# Altium PCB PCB1.PcbDoc (part 1 of 2)
Units mm, origin at the board's own origin, x right, y up, seen from the top; angles counter-clockwise.
Board outline 75.29 x 33.02 mm, 4 copper layers (Top Layer, Mid Layer 1, Mid Layer 2, Bottom Layer), stack 1.585 mm thick; 47 components, 61 nets, 235 pads, 195 vias.
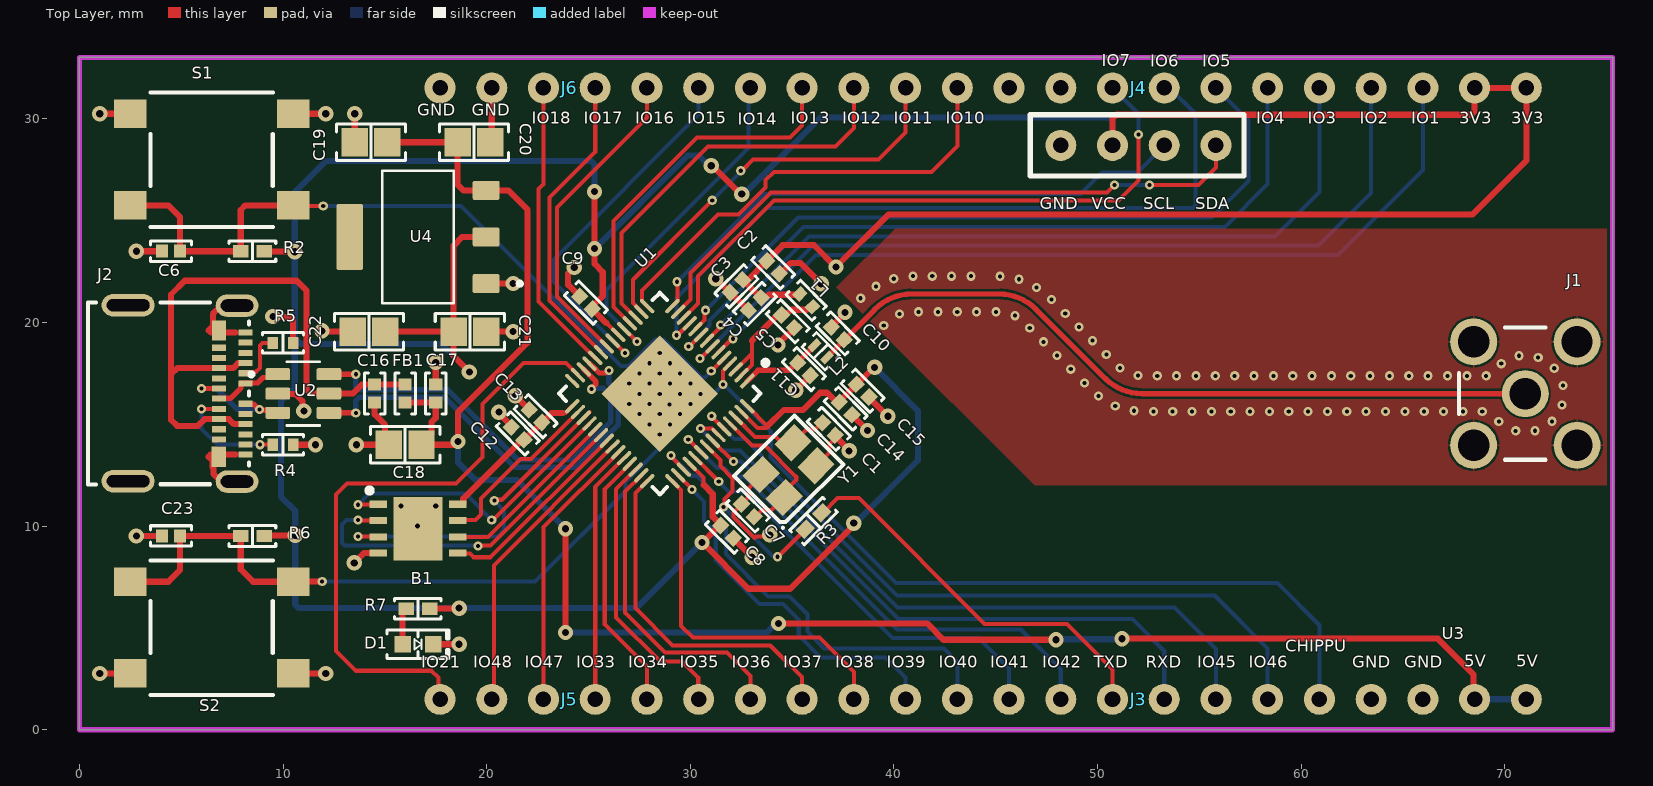
[diagram p0: Top Layer view]
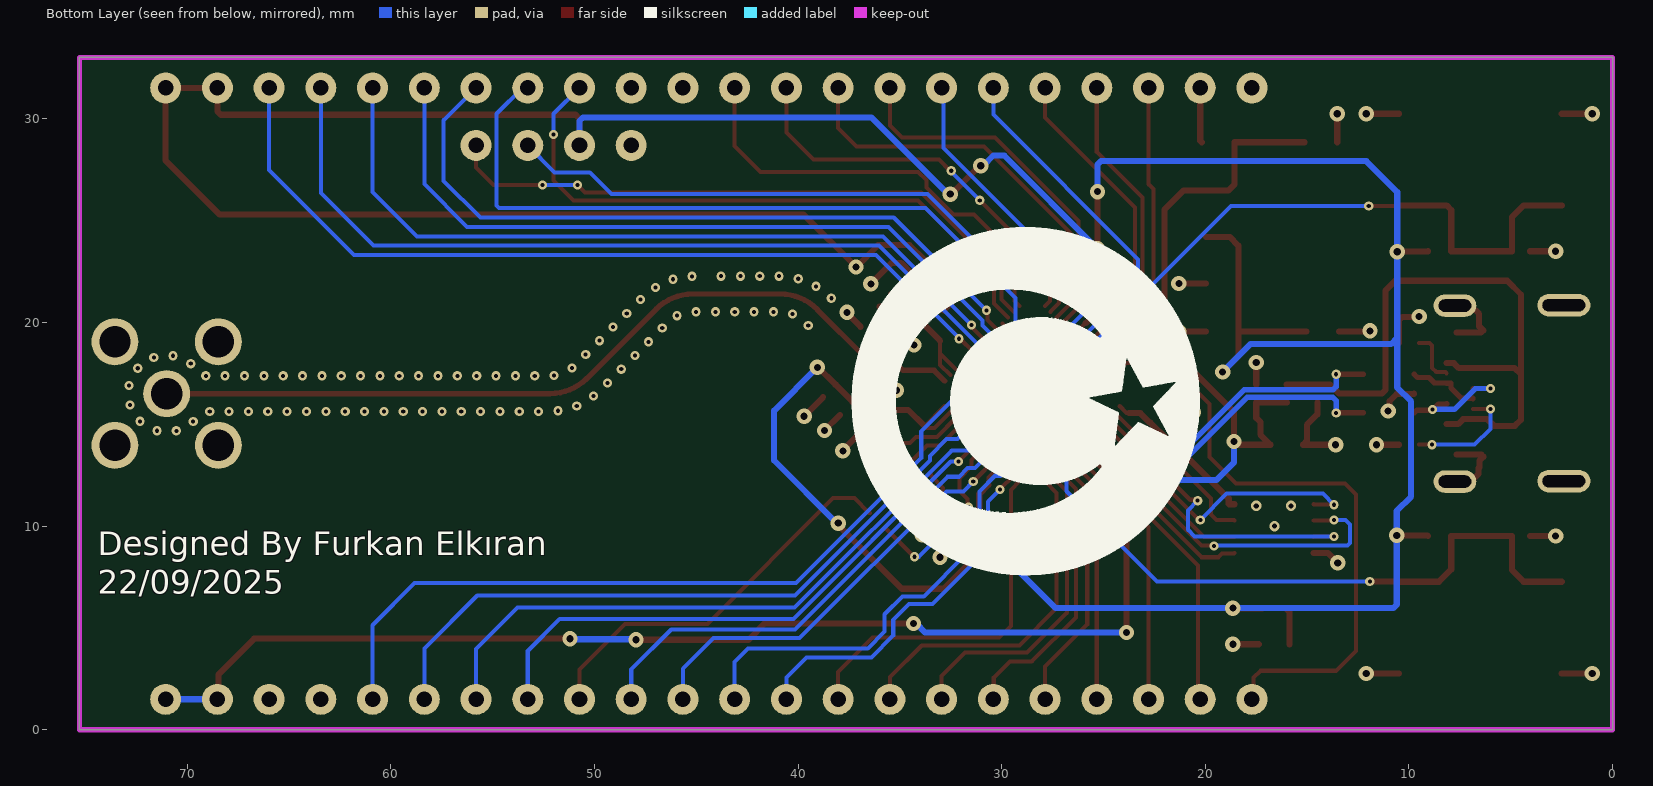
[diagram p1: Bottom Layer view, seen from below]
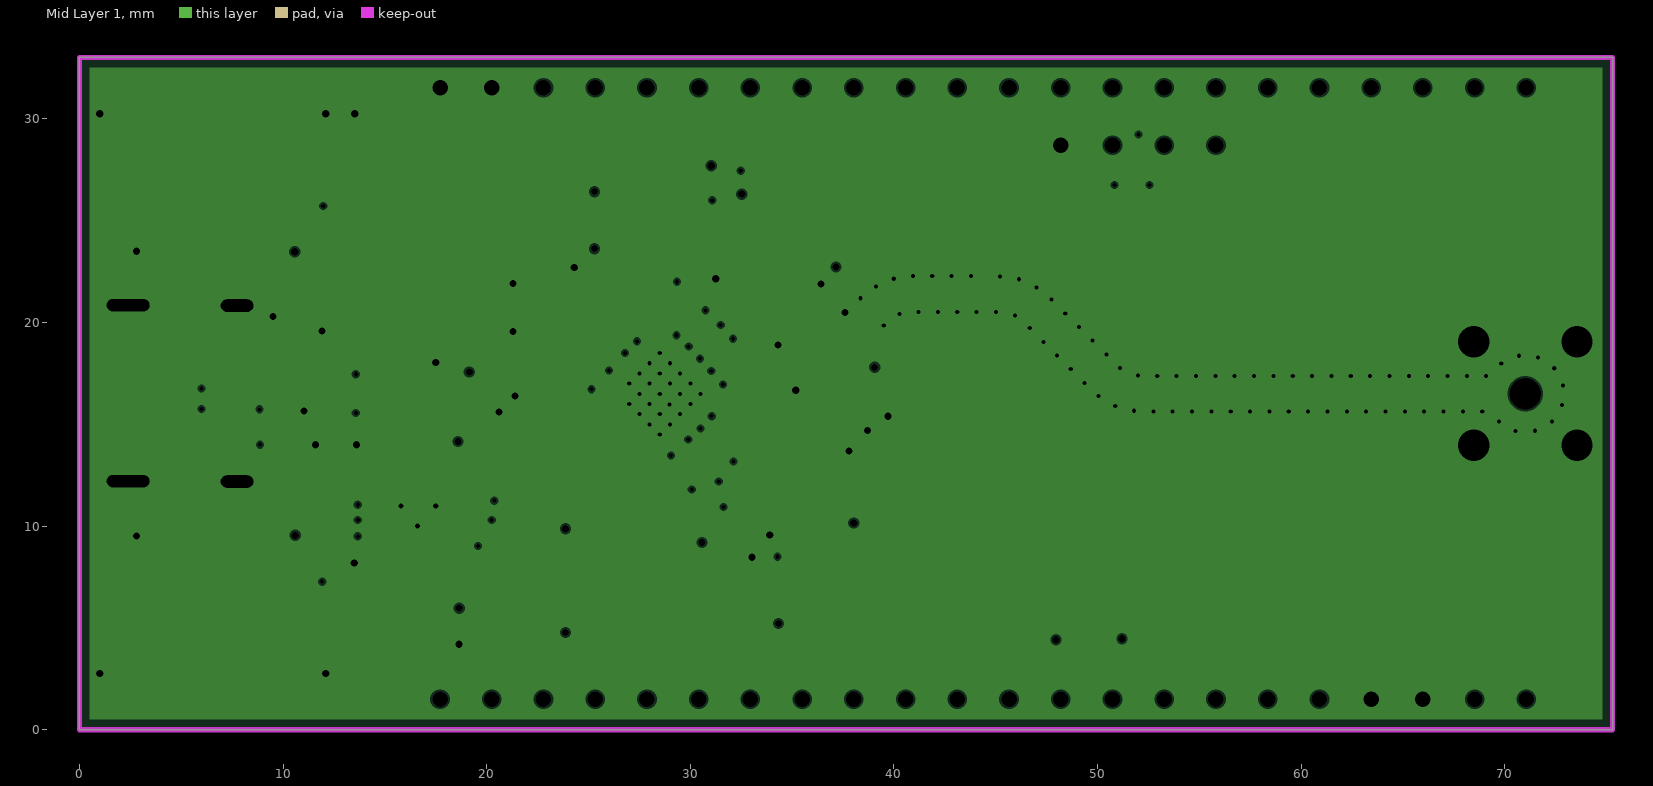
[diagram p2: Mid Layer 1, clearances drawn from the general rule]
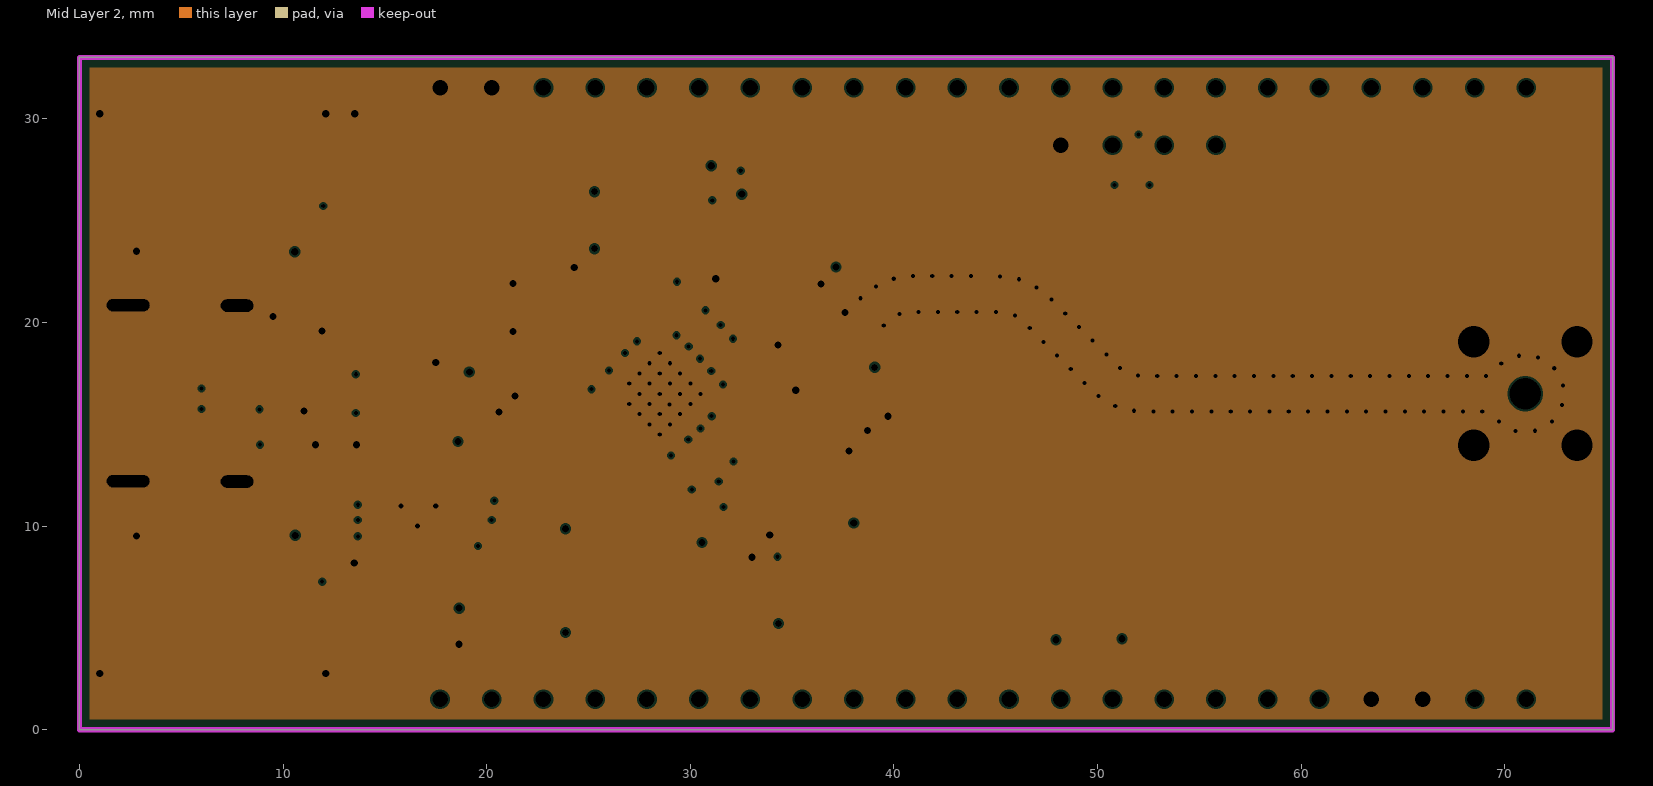
[diagram p3: Mid Layer 2, clearances drawn from the general rule]

## Layer stack, top to bottom
Top Solder: solder mask 0.0127, Solder Resist, Dk 3.8
Top Layer: signal copper 0.035
Dielectric 1: prepreg 0.21, 7628, Dk 4.4
Mid Layer 1: plane copper 0.0152, net GND
Core: core 1.065, FR-4, Dk 4.6
Mid Layer 2: plane copper 0.0152, net GND
Dielectric 2: prepreg 0.21, 7628, Dk 4.4
Bottom Layer: signal copper 0.035
Bottom Solder: solder mask 0.0127, Solder Resist, Dk 3.8

## Board outline
0,0 0,33.02 75.288,33.02 75.288,0

## Design rules (kind name [scope] priority, off if disabled: settings)
BoardOutlineClearance [All] p1: gap=0.2 ignorepadtopadclearanceinfootprint=FALSE
Clearance RF_Clearance [InNet('NetC10_2')] p1: gap=0.102 ignorepadtopadclearanceinfootprint=FALSE except(0.127: Arc-Via Track-Via SMDPad-Via THPad-Via Via-Via Via-Fill Via-Poly Via-Region Via-Text; 0.13: Arc-Poly Track-Poly; 0.25: Arc-Hole Track-Hole SMDPad-Hole THPad-Hole Via-Hole Fill-Hole Poly-Hole Region-Hole Text-Hole)
Clearance [All] p2: gap=0.102 ignorepadtopadclearanceinfootprint=FALSE except(0.127: Arc-Via Track-Via SMDPad-Via THPad-Via Via-Via Via-Fill Via-Poly Via-Region Via-Text; 0.25: Arc-Hole Track-Hole SMDPad-Hole THPad-Hole Via-Hole Fill-Hole Poly-Hole Region-Hole Text-Hole)
ComponentClearance [All] p1: gap=0.102 collisioncheckmode=3 verticalgap=0.102 showdistances=TRUE
DiffPairsRouting [All] p1: maxlimit=0.102 minlimit=0.102 mostfreqgap=0.102 toplayer_minwidth=0.102 toplayer_maxwidth=1816.048 toplayer_prefwidth=0.102 bottomlayer_minwidth=0.102 bottomlayer_maxwidth=1816.048 bottomlayer_prefwidth=0.102 maxuncoupledlength=12.7
DiffPairsRouting USB90R1 [InDifferentialPair('USBO')] p2: maxlimit=0.15 minlimit=0.15 mostfreqgap=0.15 toplayer_minwidth=0.265 toplayer_maxwidth=0.265 toplayer_prefwidth=0.265 bottomlayer_minwidth=0.265 bottomlayer_maxwidth=0.265 bottomlayer_prefwidth=0.265 impedanceprofiledriven=TRUE impedanceprofileid={DA624E46-C224-4D8B-AF26-3BDF44110CB9} impedanceprofilevalue=90.000000 maxuncoupledlength=12.7
DiffPairsRouting USB90R [InDifferentialPair('USBC')] p3: maxlimit=0.15 minlimit=0.15 mostfreqgap=0.15 toplayer_minwidth=0.265 toplayer_maxwidth=0.265 toplayer_prefwidth=0.265 bottomlayer_minwidth=0.265 bottomlayer_maxwidth=0.265 bottomlayer_prefwidth=0.265 impedanceprofiledriven=TRUE impedanceprofileid={DA624E46-C224-4D8B-AF26-3BDF44110CB9} impedanceprofilevalue=90.000000 maxuncoupledlength=12.7
Height [All] p1: minheight=0 maxheight=1816.048 prefheight=12.7
HoleSize [All] p1: absolutevalues=TRUE maxlimit=6.3 minlimit=0.2 maxpercent=80.000 minpercent=20.000
HoleToHoleClearance [All] p1: gap=0.25 allowstackedmicrovias=FALSE
MinimumAnnularRing [All] p1: minimumring=0.076
MinimumSolderMaskSliver [All] p1: minsoldermaskwidth=0
PlaneClearance [All] p1: clearance=0.102
PlaneConnect PlaneConnectPowerPads [InPadClass('PowerPads')] p1: planeconnectstyle=Direct reliefexpansion=0.508 reliefentries=4 reliefconductorwidth=0.254 reliefairgap=0.254
PlaneConnect [All] p2: pad.planeconnectstyle=Relief pad.reliefexpansion=0.3 pad.reliefentries=4 pad.reliefconductorwidth=0.102 pad.reliefairgap=0.102 via.planeconnectstyle=Direct via.reliefexpansion=0.3 via.reliefentries=4 via.reliefconductorwidth=0.127 via.reliefairgap=0.127
PolygonConnect PolygonConnectPowerPads [All vs (InPadClass('PowerPads'))] p1: connectstyle=Direct reliefconductorwidth=0.254 reliefentries=4 polygonreliefangle="90 Angle" airgapwidth=0.254
PolygonConnect [All] p2: thpad.connectstyle=Relief thpad.reliefconductorwidth=0.102 thpad.reliefentries=4 thpad.polygonreliefangle="90 Angle" thpad.airgapwidth=0.102 smdpad.connectstyle=Relief smdpad.reliefconductorwidth=0.102 smdpad.reliefentries=4 smdpad.polygonreliefangle="90 Angle" smdpad.airgapwidth=0.102 via.connectstyle=Direct via.reliefconductorwidth=0.127 via.reliefentries=4 via.polygonreliefangle="90 Angle" via.airgapwidth=0.127
RoutingVias [All] p1: holewidth=0.2 width=0.45 viastyle="Through Hole" minholewidth=0.15 minwidth=0.3 maxholewidth=6.3 maxwidth=6.55
SilkToSilkClearance [All] p1: silktosilkclearance=0
SilkToSolderMaskClearance [IsPad] p1: minsilkscreentomaskgap=0.102 clearancetoexposedcopper=TRUE
SolderMaskExpansion [All] p1: expansion=0.075 istentingtop=FALSE
SupplyNets "Schematic Supply Nets_3" [InNet('VBUS')] p1: voltage=0.000
SupplyNets "Schematic Supply Nets_2" [InNet('GND')] p2: voltage=0.000
SupplyNets "Schematic Supply Nets_1" [InNet('+5')] p3: voltage=0.000
SupplyNets "Schematic Supply Nets" [InNet('3V3')] p4: voltage=0.000
Width [All] p1: maxlimit=1816.048 minlimit=0.102 preferedwidth=0.102
Width RF_50R1 [InNet('NetC10_2')] p2: maxlimit=0.263 minlimit=0.263 preferedwidth=0.263 impedanceprofiledriven=TRUE impedanceprofileid={817B1D0C-1745-41DE-895A-E69CDF0ADFAD} impedanceprofilevalue=50.000000 minimp=50.000000 maximp=50.000000 favimp=50.000000
Width RF_50 [InNet('LNA_IN')] p3: maxlimit=0.263 minlimit=0.263 preferedwidth=0.263 impedanceprofiledriven=TRUE impedanceprofileid={817B1D0C-1745-41DE-895A-E69CDF0ADFAD} impedanceprofilevalue=50.000000 minimp=50.000000 maximp=50.000000 favimp=50.000000
20 further rules are at their usual default settings.

## Classes and differential pairs
component class U_USB-C: C16 C17 C18 FB1 J2 R4 R5 U2
component class U_SSD1306: U3
component class U_Power: C19 C20 C21 C22 D1 R7 U4
component class U_ESP32-S3: B1 C1 C2 C3 C4 C5 C6 C7 C8 C9 C10 C11 C12 C13 C14 C15 C23 J1 L1 L2 R2 R3 R6 S1 S2 U1 Y1
component class "Main Sheet": J3 J4 J5 J6
differential pair USBO: +USBO_P -USBO_N
differential pair USBC: +USBC_P -USBC_N

## Components (designator, comment, footprint, x,y, rotation, side; value= is the part's Value field where it differs from the comment)
B1 "W25Q64JVXGIQ_TR" SON80P400X400X50-9N 16.625,9.875 r0 top
C1 "10pF" "CAP 0402_1005" 36.8,14.775 r315 top
C2 "10µF" "CAP 0402_1005" 34.064,22.711 r135 top
C3 "1 µF" "CAP 0402_1005" 32.264,21.786 r45 top
C4 "0.1µF" "CAP 0402_1005" 33.164,20.911 r45 top
C5 "0.1µF" "CAP 0402_1005" 34.789,20.061 r135 top
C6 "1 µF" "CAP 0402_1005" 4.5,23.5 r0 top
C7 "10pF" "CAP 0402_1005" 32.825,10.775 r315 top
C8 "0.1µF" "CAP 0402_1005" 31.8,9.725 r135 top
C9 "0.1µF" "CAP 0402_1005" 24.875,20.975 r315 top
C10 "1pF" "CAP 0402_1005" 37.239,19.461 r315 top
C11 "1pF" "CAP 0402_1005" 35.579,17.711 r135 top
C12 "0.1µF" "CAP 0402_1005" 21.525,14.55 r315 top
C13 "0.1µF" "CAP 0402_1005" 22.4,15.4 r315 top
C14 "1 µF" "CAP 0402_1005" 37.625,15.775 r135 top
C15 "1 µF" "CAP 0402_1005" 38.46,16.65 r135 top
C16 "10000pF" "CAP 0402_1005" 14.5,16.51 r90 top
C17 "0.1µF" "CAP 0402_1005" 17.5,16.51 r270 top
C18 "4.7 µF" "CAP 0805_2012" 16,14 r0 top
C19 "10 µF" "CAP 0805_2012" 14.325,28.85 r0 top
C20 "0.1µF" "CAP 0805_2012" 19.375,28.85 r180 top
C21 "0.1µF" "CAP 0805_2012" 19.175,19.55 r180 top
C22 "10 µF" "CAP 0805_2012" 14.225,19.55 r0 top
C23 "1 µF" "CAP 0402_1005" 4.5,9.52 r0 top
D1 "Red" "LED 0603_1608 RED" 16.625,4.2 r0 top
FB1 "33 Ohms @ 100 MHz" "FER 0402_1005" 16,16.51 r270 top
J1 "0731000114" "MOLEX SD-73100-0114" 71,16.51 r0 top
J2 "1054500101" "Molex 1054500101" 7.5,16.51 r270 top
J3 "1x16 Male Pin" "1X16 MALE PIN" 52,1.5 r270 top
J4 "1x16 Male Pin" "1X16 MALE PIN" 52,31.52 r270 top
J5 "1x6 Male Pin" "1X6 MALE PIN" 24.06,1.5 r270 top
J6 "1x6 Male Pin" "1X6 MALE PIN" 24.06,31.52 r270 top
L1 "2 nH" "IND 0402_1005" 35.689,21.086 r315 top
L2 "3.3 nH" "Murata LQG15 0402" 36.404,18.586 r135 top
R2 "10 kOhms" "RES 0402_1005" 8.5,23.5 r0 top
R3 "499 Ohms" "RES 0402_1005" 36.05,10.25 r225 top
R4 "5.1 kOhms" "YAGEO RES 0402_1005" 10,14 r180 top
R5 "5.1 kOhms" "YAGEO RES 0402_1005" 10,19 r180 top
R6 "10 kOhms" "RES 0402_1005" 8.5,9.52 r0 top
R7 "1 kOhms" "RES 0402_1005" 16.625,5.95 r0 top
S1 "B3FS-1012P" "OMRON B3FS-1012P" 6.5,28 r180 top
S2 "B3FS-1012P" "OMRON B3FS-1012P" 6.5,5.02 r0 top
U1 "ESP32-S3R8" FP-ESP32-S3R8-IPC_A 28.5,16.51 r225 top locked
U2 "USBLC6-2SC6" SOT95P280X145-6N 11,16.51 r0 top
U3 "SSD1306" SSD1306 52,16.51 r0 top locked
U4 "AMS1117-3.3" SOT229P700X180-4N 16.625,24.2 r180 top
Y1 "40 MHz" "NDK NX3225SA" 34.825,12.75 r45 top

## Footprints (in the part's own frame and the unit in brackets; to place one, negate y for a bottom-side part, rotate by r counter-clockwise, add the part's x,y. Pads: shape width x height; smd on the part's side, far side on the other; paste and mask are expansions set on the pad)
"1X6 MALE PIN" [mil]
  round 60 hole 30: 1(0,250) 2(0,150) 3(0,50) 4(0,-50) 5(0,-150) 6(0,-250)
  body extent -51,-301 49,299, height 110
"1X16 MALE PIN" [mil]
  round 60 hole 30: 1(0,750) 2(0,650) 3(0,550) 4(0,450) 5(0,350) 6(0,250) 7(0,150) 8(0,50) 9(0,-50) 10(0,-150) 11(0,-250) 12(0,-350) 13(0,-450) 14(0,-550) 15(0,-650) 16(0,-750)
  body extent -50,-801 50,799, height 110
"CAP 0402_1005" [mm] "Chip Capacitor, 2-Leads, Body 1.02x0.51mm, IPC Medium Density"
  rect 0.6x0.64 smd: 1(-0.44,0) 2(0.44,0)
  silkscreen extent -1,-0.5 1,0.5, body extent -0.5,-0.26 0.5,0.26, height 0.52
"CAP 0805_2012" [mm] "Chip Capacitor, 2-Leads, Body 2.00x1.20mm, IPC Medium Density"
  rect 1.3x1.4 smd: 1(-0.8,0) 2(0.8,0)
  silkscreen extent -1.7,-0.9 1.7,0.9, body extent -1,-0.64 1,0.64, height 1.26
"FER 0402_1005" [mm] "Chip Ferrite, 2-Leads, Body 1.02x0.51mm, IPC Medium Density"
  rect 0.6x0.64 smd: 1(-0.44,0) 2(0.44,0)
  silkscreen extent -1,-0.5 1,0.5, body extent -0.5,-0.26 0.5,0.26, height 0.52
FP-ESP32-S3R8-IPC_A [mm]
  rect 0.918x0.192 smd paste+0 mask+0: 1(-3.477,2.6)
  rrect100% 0.918x0.192 smd paste+0 mask+0: 2(-3.477,2.2) 3(-3.477,1.8) 4(-3.477,1.4) 5(-3.477,1) 6(-3.477,0.6) 7(-3.477,0.2) 8(-3.477,-0.2) 9(-3.477,-0.6) 10(-3.477,-1) 11(-3.477,-1.4) 12(-3.477,-1.8) 13(-3.477,-2.2) 14(-3.477,-2.6) 29(3.477,-2.6) 30(3.477,-2.2) 31(3.477,-1.8) 32(3.477,-1.4) 33(3.477,-1) 34(3.477,-0.6) 35(3.477,-0.2) 36(3.477,0.2) 37(3.477,0.6) 38(3.477,1) 39(3.477,1.4) 40(3.477,1.8) 41(3.477,2.2) 42(3.477,2.6)
  rrect100% 0.192x0.918 smd paste+0 mask+0: 15(-2.6,-3.477) 16(-2.2,-3.477) 17(-1.8,-3.477) 18(-1.4,-3.477) 19(-1,-3.477) 20(-0.6,-3.477) 21(-0.2,-3.477) 22(0.2,-3.477) 23(0.6,-3.477) 24(1,-3.477) 25(1.4,-3.477) 26(1.8,-3.477) 27(2.2,-3.477) 28(2.6,-3.477) 43(2.6,3.477) 44(2.2,3.477) 45(1.8,3.477) 46(1.4,3.477) 47(1,3.477) 48(0.6,3.477) 49(0.2,3.477) 50(-0.2,3.477) 51(-0.6,3.477) 52(-1,3.477) 53(-1.4,3.477) 54(-1.8,3.477) 55(-2.2,3.477) 56(-2.6,3.477)
  rect 4.05x4.05 smd paste-1000 mask+0: 57(0,0)
  silkscreen extent -4.86,-3.5 3.5,3.5, body extent -3.5,-3.5 3.5,3.5, height 0.9
"IND 0402_1005" [mm] "Inductor, 2-Leads, Body 1.02x0.51mm, IPC Medium Density"
  rect 0.5x0.6 smd: 1(-0.44,0) 2(0.44,0)
  silkscreen extent -0.9,-0.5 0.9,0.5, body extent -0.5,-0.3 0.5,0.3, height 0.6
"LED 0603_1608 RED" [mm] "Chip Diode, 2-Leads, Body 1.60x0.80mm, IPC Medium Density"
  rect 0.8x0.8 smd: 1(-0.75,0) 2(0.75,0)
  silkscreen extent -1.52,-0.7 1.52,0.7, body extent -0.8,-0.4 0.8,0.4, height 0.53
"Molex 1054500101" [mm] "USB-C Receptacle Connector 24 Position Surface Mount, 24 Position, Body 8.94x7.90mm"
  rect 0.3x0.7 smd: A1(-3,0.655) A2(-2.5,0.655) A3(-2,0.655) A4(-1.5,0.655) A5(-1,0.655) A6(-0.5,0.655) A7(0.5,0.655) A8(1,0.655) A9(1.5,0.655) A10(2,0.655) A11(2.5,0.655) A12(3,0.655) B2(2.25,-0.645) B3(1.75,-0.645) B4(1.25,-0.645) B5(0.75,-0.645) B6(0.25,-0.645) B7(-0.25,-0.645) B8(-0.75,-0.645) B9(-1.25,-0.645) B10(-1.75,-0.645) B11(-2.25,-0.645)
  rect 1x0.7 smd: B1(3.1,-0.655) B12(-3.1,-0.645)
  oval 1.1x2.6 hole 2.1 slot 0.6 at 0 deg: S(-4.34,-5.105) S(4.3,-5.105)
  oval 1.1x2.1 hole 1.6 slot 0.6 at 0 deg: S(-4.32,0.245) S(4.32,0.245)
  silkscreen extent -4.47,-7.07 4.47,0.83, body extent -4.47,-7.07 4.47,0.83, height 3.21
"MOLEX SD-73100-0114" [mm]
  round 2.302 hole 1.54: G(-2.54,-2.54) G(2.54,-2.54)
  round 2.304 hole 1.54: G(-2.54,2.54) G(2.54,2.54) S(0,0)
  silkscreen extent -3.25,-3.25 1,3.25, body extent -3.12,-3.17 11.68,3.17, height 9.67
"Murata LQG15 0402" [mm] "Chip Inductor, 2-Leads, Body 1.00x0.50mm, IPC High Density"
  rect 0.35x0.65 smd: 1(-0.425,0) 2(0.425,0)
  silkscreen extent -0.8,-0.5 0.8,0.5, body extent -0.52,-0.27 0.53,0.28, height 0.55
"NDK NX3225SA" [mm] "Crystal, 4-Leads, Body 2.50x3.20mm, Pitch 2.20mm, IPC Medium Density"
  rect 1.4x1.2 smd: 1(-1.1,-0.8) 2(1.1,-0.8) 3(1.1,0.8) 4(-1.1,0.8)
  silkscreen extent -2.25,-1.85 2.1,1.7, body extent -1.61,-1.26 1.61,1.26, height 0.6
"OMRON B3FS-1012P" [mm] "B3FS-1000 Flat Style, 4 Pins, 6.3x6.3x4.3mm, 4.5mm Pitch"
  rect 1.6x1.4 smd: 1(4,-2.25) 2(-4,-2.25) 3(4,2.25) 4(-4,2.25)
  silkscreen extent -3,-3.3 3,3.3, body extent -4,-3.15 4,3.15, height 4.2
"RES 0402_1005" [mm] "Chip Resistor, 2-Leads, Body 1.0x0.5mm, IPC Medium Density"
  rect 0.75x0.6 smd: 1(-0.575,0) 2(0.575,0)
  silkscreen extent -1.14,-0.51 1.14,0.51, body extent -0.5,-0.25 0.5,0.25, height 0.35
SON80P400X400X50-9N [mm]
  rect 0.85x0.35 smd: 1(-1.95,1.2) 2(-1.95,0.4) 3(-1.95,-0.4) 4(-1.95,-1.2) 5(1.95,-1.2) 6(1.95,-0.4) 7(1.95,0.4) 8(1.95,1.2)
  rect 2.4x3.1 smd: 9(0,0)
  silkscreen extent -2.5,1.75 -2.25,2, body extent -2.05,-2 2.05,2, height 0.5
SOT95P280X145-6N [mm]
  rrect25% 1.21x0.59 smd: 1(-1.255,0.95) 2(-1.255,0) 3(-1.255,-0.95) 4(1.255,-0.95) 5(1.255,0) 6(1.255,0.95)
  silkscreen extent -2.65,-1.57 0.81,1.57, body extent -1.4,-1.46 1.4,1.46, height 0.4
SOT229P700X180-4N [mm]
  rrect15% 1.31x0.93 smd: 1(-3.345,2.29) 2(-3.345,0) 3(-3.345,-2.29)
  rrect15% 1.31x3.24 smd: 4(3.345,0)
  silkscreen extent -5.1,-3.25 1.75,3.25, body extent -3.63,-3.25 3.37,3.25, height 1.8
SSD1306 [mil]
  round 60 hole 30: 0(-150,479.82) 1(-50,479.82) 2(50,479.82) 3(150,479.82)
  silkscreen extent -209,421 204,539, body extent -559,-540 559,539, height 236
"YAGEO RES 0402_1005" [mm] "Chip Resistor, 2-Leads, Body 1.0x0.5mm"
  rect 0.5x0.6 smd: 1(-0.5,0) 2(0.5,0)
  silkscreen extent -1,-0.51 1,0.51, body extent -0.5,-0.25 0.5,0.25, height 0.35

## Part data
B1: "NOR Flash Serial (SPI, Dual SPI, Quad SPI) 3V/3.3V 64M-bit 8M x 8 6ns 8-Pin XSON EP T/R", Arrow Part Number="W25Q64JVXGIQ TR", Manufacturer_Name=Winbond, Mouser Part Number=454-W25Q64JVXGIQTR, Arrow Price/Stock=https://www.arrow.com/en/products/w25q64jvxgiqtr/winbond-electronics?utm_currency=USD&region=nac, Datasheet Link=https://www.mouser.com/datasheet/2/949/w25q64jv_revj_03272018_plus-1489671.pdf, Geometry.Height=0.5mm, Manufacturer_Part_Number="W25Q64JVXGIQ TR", Mouser Price/Stock=https://www.mouser.co.uk/ProductDetail/Winbond/W25Q64JVXGIQ-TR?qs=qSfuJ%252Bfl%2Fd5kgMLGcal3yA%3D%3D
C1 C7: library part 0402YA100KAT2A, "CAP CER 10PF 16V NP0 0402", Device Package="0402 (1005 Metric)", manufacturer="AVX Corporation", Operating Temperature="-55°C ~ 125°C", Supplier Part Number 1=478-12649-1-ND, Temperature Coefficient="C0G, NP0", Tolerance=±10%, Voltage - Rated=16V, Applications="General Purpose", Capacitance=10pF, componentlink1description=Datasheet, componentlink1url=http://datasheets.avx.com/C0GNP0-Dielectric.pdf, componentlink2description="DigiKey Link", componentlink2url=http://digikey.com/product-detail/en/avx-corporation/0402YA100KAT2A/478-12649-1-ND/9949182, lastupdated="8.02.2022 12:26:50", Lifecycle Status=Active, Minimum Order=1, Mounting Type="Surface Mount, MLCC", Package / Case="0402 (1005 Metric)", packaging=TapeAndReel, Part Number=0402YA100KAT2A, Part Status=Active, partid=7279, price=0.01, series=-, Size / Dimension="0.039\" L x 0.020\" W (1.00mm x 0.50mm)", Supplier 1=DigiKey, Thickness (Max)="0.022\" (0.56mm)"
C2: library part 0402ZD106MAT2A, "CAP CER 10UF 10V X5R 0402", Device Package="0402 (1005 Metric)", manufacturer="AVX Corporation", Operating Temperature="-55°C ~ 85°C", Supplier Part Number 1=478-10052-1-ND, Temperature Coefficient=X5R, Tolerance=±20%, Voltage - Rated=10V, Applications="General Purpose", Capacitance=10µF, componentlink1description=Datasheet, componentlink1url=http://datasheets.avx.com/cx5r.pdf, componentlink2description="DigiKey Link", componentlink2url=http://digikey.com/product-detail/en/avx-corporation/0402ZD106MAT2A/478-10052-1-ND/6564275, lastupdated="8.02.2022 12:26:50", Lifecycle Status=Active, Minimum Order=1, Mounting Type="Surface Mount, MLCC", Package / Case="0402 (1005 Metric)", packaging=TapeAndReel, Part Number=0402ZD106MAT2A, Part Status=Active, partid=6854, price=0.24, series=-, Size / Dimension="0.039\" L x 0.020\" W (1.00mm x 0.50mm)", Supplier 1=DigiKey, Thickness (Max)="0.028\" (0.71mm)"
C3 C6 C14 C23: library part GMC04X7R105K10NT, "CAP0402 X7R 1UF 10% 10V", Device Package="0402 (1005 Metric)", manufacturer="Cal-Chip Electronics, Inc.", Operating Temperature="-55°C ~ 125°C", Supplier Part Number 1=4713-GMC04X7R105K10NTCT-ND, Temperature Coefficient=X7R, Tolerance=±10%, Voltage - Rated=10V, Applications="General Purpose", Capacitance="1 µF", componentlink1description=Datasheet, componentlink1url=https://88ce57.p3cdn1.secureserver.net/wp-content/uploads/2023/01/gmc_series-2.pdf, componentlink2description="DigiKey Link", componentlink2url=https://www.digikey.com/en/products/detail/cal-chip-electronics-inc/GMC04X7R105K10NT/18151137, lastupdated="9.02.2024 20:03:57", Lifecycle Status=Active, Minimum Order=1, Mounting Type="Surface Mount, MLCC", Package / Case="0402 (1005 Metric)", packaging=TapeAndReel, Part Number=GMC04X7R105K10NT, Part Status=Active, partid=49948, price=0.02, series=GMC, Size / Dimension="0.039\" L x 0.020\" W (1.00mm x 0.50mm)", Supplier 1=DigiKey, Thickness (Max)="0.022\" (0.55mm)"
C4 C5 C8 C9 C12 C13: library part 0402YD104JAT2A, "CAP CER 0.1UF 16V X5R 0402", Device Package="0402 (1005 Metric)", manufacturer="AVX Corporation", Operating Temperature="-55°C ~ 85°C", Supplier Part Number 1=478-11505-1-ND, Temperature Coefficient=X5R, Tolerance=±5%, Voltage - Rated=16V, Applications="General Purpose", Capacitance=0.1µF, componentlink1description=Datasheet, componentlink1url=http://datasheets.avx.com/cx5r.pdf, componentlink2description="DigiKey Link", componentlink2url=http://digikey.com/product-detail/en/avx-corporation/0402YD104JAT2A/478-11505-1-ND/8107706, lastupdated="8.02.2022 12:26:42", Lifecycle Status=Active, Minimum Order=1, Mounting Type="Surface Mount, MLCC", Package / Case="0402 (1005 Metric)", packaging=TapeAndReel, Part Number=0402YD104JAT2A, Part Status=Active, partid=11013, price=0.15, series=-, Size / Dimension="0.039\" L x 0.020\" W (1.00mm x 0.50mm)", Supplier 1=DigiKey, Thickness (Max)="0.022\" (0.56mm)"
C10 C11: library part 04023A1R0BAT2A, "CAP CER 1PF 25V NP0 0402", Device Package="0402 (1005 Metric)", manufacturer="AVX Corporation", Operating Temperature="-55°C ~ 125°C", Supplier Part Number 1=478-11739-1-ND, Temperature Coefficient="C0G, NP0", Tolerance=±0.1pF, Voltage - Rated=25V, Applications="General Purpose", Capacitance=1pF, componentlink1description=Datasheet, componentlink1url=http://datasheets.avx.com/C0GNP0-Dielectric.pdf, componentlink2description="DigiKey Link", componentlink2url=http://digikey.com/product-detail/en/avx-corporation/04023A1R0BAT2A/478-11739-1-ND/8573375, lastupdated="8.02.2022 12:26:50", Lifecycle Status=Active, Minimum Order=1, Mounting Type="Surface Mount, MLCC", Package / Case="0402 (1005 Metric)", packaging=TapeAndReel, Part Number=04023A1R0BAT2A, Part Status=Active, partid=7016, price=0.06, series=-, Size / Dimension="0.039\" L x 0.020\" W (1.00mm x 0.50mm)", Supplier 1=DigiKey, Thickness (Max)="0.022\" (0.56mm)"
C15: library part GMC04X7R105K10NT, "CAP0402 X7R 1UF 10% 10V", Capacitance="10 nF", Device Package="0402 (1005 Metric)", manufacturer="Cal-Chip Electronics, Inc.", Operating Temperature="-55°C ~ 125°C", Supplier Part Number 1=4713-GMC04X7R105K10NTCT-ND, Temperature Coefficient=X7R, Tolerance=±10%, Voltage - Rated=10V, Applications="General Purpose", componentlink1description=Datasheet, componentlink1url=https://88ce57.p3cdn1.secureserver.net/wp-content/uploads/2023/01/gmc_series-2.pdf, componentlink2description="DigiKey Link", componentlink2url=https://www.digikey.com/en/products/detail/cal-chip-electronics-inc/GMC04X7R105K10NT/18151137, lastupdated="9.02.2024 20:03:57", Lifecycle Status=Active, Minimum Order=1, Mounting Type="Surface Mount, MLCC", Package / Case="0402 (1005 Metric)", packaging=TapeAndReel, Part Number=GMC04X7R105K10NT, Part Status=Active, partid=49948, price=0.02, series=GMC, Size / Dimension="0.039\" L x 0.020\" W (1.00mm x 0.50mm)", Supplier 1=DigiKey, Thickness (Max)="0.022\" (0.55mm)"
C16: library part 0402YC103JAT4A, "CAP CER 10000PF 16V X7R 0402", Capacitance=10nF, Device Package="0402 (1005 Metric)", manufacturer="AVX Corporation", Operating Temperature="-55°C ~ 125°C", Supplier Part Number 1=478-12448-1-ND, Temperature Coefficient=X7R, Tolerance=±5%, Voltage - Rated=16V, Applications="General Purpose", componentlink1description=Datasheet, componentlink1url=http://datasheets.avx.com/X7RDielectric.pdf, componentlink2description="DigiKey Link", componentlink2url=http://digikey.com/product-detail/en/avx-corporation/0402YC103JAT4A/478-12448-1-ND/9749300, lastupdated="8.02.2022 12:26:50", Lifecycle Status=Active, Minimum Order=1, Mounting Type="Surface Mount, MLCC", Package / Case="0402 (1005 Metric)", packaging=TapeAndReel, Part Number=0402YC103JAT4A, Part Status=Active, partid=6953, price=0.06, series=-, Size / Dimension="0.039\" L x 0.020\" W (1.00mm x 0.50mm)", Supplier 1=DigiKey, Thickness (Max)="0.022\" (0.56mm)"
C17: library part 0402YC104JAT4A, "CAP CER 0.1UF 16V X7R 0402", Device Package="0402 (1005 Metric)", manufacturer="AVX Corporation", Operating Temperature="-55°C ~ 125°C", Supplier Part Number 1=478-11502-1-ND, Temperature Coefficient=X7R, Tolerance=±5%, Voltage - Rated=16V, Applications="General Purpose", Capacitance=0.1µF, componentlink1description=Datasheet, componentlink1url=http://datasheets.avx.com/X7RDielectric.pdf, componentlink2description="DigiKey Link", componentlink2url=http://digikey.com/product-detail/en/avx-corporation/0402YC104JAT4A/478-11502-1-ND/8107703, lastupdated="8.02.2022 12:26:57", Lifecycle Status=Active, Minimum Order=1, Mounting Type="Surface Mount, MLCC", Package / Case="0402 (1005 Metric)", packaging=CutTape, Part Number=0402YC104JAT4A, Part Status=Active, partid=2382, price=0.10, series=-, Size / Dimension="0.039\" L x 0.020\" W (1.00mm x 0.50mm)", Supplier 1=DigiKey, Thickness (Max)="0.022\" (0.56mm)"
C18: library part C0805C475J4RACAUTO, "CAP CER 4.7UF 16V X7R 0805", Device Package="0805 (2012 Metric)", manufacturer=KEMET, Operating Temperature="-55°C ~ 125°C", Ratings=AEC-Q200, Supplier Part Number 1=399-15716-1-ND, Temperature Coefficient=X7R, Tolerance=±5%, Voltage - Rated=16V, Applications="Automotive, Bypass, Decoupling", Capacitance="4.7 µF", componentlink1description=Datasheet, componentlink1url=https://api.kemet.com/component-edge/download/datasheet/C0805C475J4RACAUTO.pdf, componentlink2description="DigiKey Link", componentlink2url=https://www.digikey.com/en/products/detail/kemet/C0805C475J4RACAUTO/7427546, lastupdated="9.02.2024 20:15:37", Lifecycle Status=Active, Minimum Order=1, Mounting Type="Surface Mount, MLCC", Package / Case="0805 (2012 Metric)", packaging=TapeAndReel, Part Number=C0805C475J4RACAUTO, Part Status=Active, partid=39263, price=0.12, series="SMD Auto X7R", Size / Dimension="0.079\" L x 0.049\" W (2.00mm x 1.25mm)", Supplier 1=DigiKey, Thickness (Max)="0.055\" (1.40mm)"
C19 C22: library part CL21X106KAYNNNE, "CAP CER 10UF 25V X6S 0805", Device Package="0805 (2012 Metric)", manufacturer="Samsung Electro-Mechanics", Operating Temperature="-55°C ~ 105°C", Supplier Part Number 1=1276-6698-1-ND, Temperature Coefficient=X6S, Tolerance=±10%, Voltage - Rated=25V, Applications="General Purpose", Capacitance="10 µF", componentlink1description=Datasheet, componentlink1url=http://www.samsungsem.com/kr/support/product-search/mlcc/CL21X106KAYNNNE.jsp, componentlink2description="DigiKey Link", componentlink2url=https://www.digikey.com/en/products/detail/samsung-electro-mechanics/CL21X106KAYNNNE/5961182, lastupdated="9.02.2024 20:16:03", Lifecycle Status=Active, Minimum Order=1, Mounting Type="Surface Mount, MLCC", Package / Case="0805 (2012 Metric)", packaging=TapeAndReel, Part Number=CL21X106KAYNNNE, Part Status=Active, partid=4781, price=0.04, series=CL, Size / Dimension="0.079\" L x 0.049\" W (2.00mm x 1.25mm)", Supplier 1=DigiKey, Thickness (Max)="0.057\" (1.45mm)"
C20 C21: library part LD055C104KAB2A, "CAP CER 0.1UF 50V X7R 0805", Device Package="0805 (2012 Metric)", manufacturer="AVX Corporation", Operating Temperature="-55°C ~ 125°C", Supplier Part Number 1=478-4931-1-ND, Temperature Coefficient=X7R, Tolerance=±10%, Voltage - Rated=50V, Applications="General Purpose", Capacitance=0.1µF, componentlink1description=Datasheet, componentlink1url=http://datasheets.avx.com/LD-Series.pdf, componentlink2description="DigiKey Link", componentlink2url=http://digikey.com/product-detail/en/avx-corporation/LD055C104KAB2A/478-4931-1-ND/1858877, lastupdated="2.09.2020 01:04:40", Lifecycle Status=Active, Minimum Order=1, Mounting Type="Surface Mount, MLCC", Package / Case="0805 (2012 Metric)", packaging=TapeAndReel, Part Number=LD055C104KAB2A, Part Status=Active, partid=3356, price=0.16, series=LD, Size / Dimension="0.079\" L x 0.049\" W (2.01mm x 1.25mm)", Supplier 1=DigiKey, Thickness (Max)="0.037\" (0.94mm)"
D1: library part QBLP601-R1, "0603 LED RED 623NM DOMINANT, 628", Current - Test=20mA, Device Package="0603 (1608 Metric)", Lens Color=Colorless, manufacturer="QT Brightek (QTB)", Millicandela Rating=9mcd, Supplier Device Package=0603, Supplier Part Number 1=1516-QBLP601-R1CT-ND, Voltage - Forward (Vf) (Typ)=2V, Color=Red, componentlink1description=Datasheet, componentlink1url=https://www.qt-brightek.com/datasheet/QBLP601-R1.pdf, componentlink2description="DigiKey Link", componentlink2url=https://www.digikey.com/en/products/detail/qt-brightek-qtb/QBLP601-R1/22106643, Configuration=Standard, Height (Max)=0.70mm, lastupdated="3.06.2024 19:59:37", Lens Size="1.10mm x 0.80mm", Lens Style="Rectangle with Flat Top", Lens Transparency=Clear, Lifecycle Status=Active, Minimum Order=1, Mounting Type="Surface Mount", Package / Case="0603 (1608 Metric)", packaging=TapeAndReel, Part Number=QBLP601-R1, partid=1462, price=0.06, series=QBLP601, Size / Dimension="1.60mm L x 0.80mm W", Supplier 1=DigiKey, Viewing Angle=140°, Wavelength - Dominant=623nm, Wavelength - Peak=628nm
FB1: library part FB100505T-330Y-S, "FBEAD 0402 33 OHM .40DC 300MA", Current Rating (Max)=300mA, DC Resistance (DCR) (Max)=400mOhm, Device Package="0402 (1005 Metric)", manufacturer="Cal-Chip Electronics, Inc.", Operating Temperature="-55°C ~ 125°C", Supplier Part Number 1=4713-FB100505T-330Y-SCT-ND, componentlink1description=Datasheet, componentlink1url=https://calchip.com/wp-content/uploads/2023/05/fb_series.pdf, componentlink2description="DigiKey Link", componentlink2url=https://www.digikey.com/en/products/detail/cal-chip-electronics-inc/FB100505T-330Y-S/22463427, Filter Type="Signal Line", Height (Max)="0.024\" (0.60mm)", lastupdated="3.06.2024 19:50:49", Lifecycle Status=Active, Minimum Order=1, Mounting Type="Surface Mount", Number of Lines=1, Package / Case="0402 (1005 Metric)", packaging=TapeAndReel, Part Number=FB100505T-330Y-S, partid=3685, price=0.02, series=FB, Size / Dimension="0.039\" L x 0.020\" W (1.00mm x 0.50mm)", Supplier 1=DigiKey, Impedance @ Frequency="33 Ohms @ 100 MHz"
J1: "CONN SMA RCPT R/A 50 OHM PCB", Frequency - Max="18 GHz", Housing Color=Gold, manufacturer=Molex, Supplier Part Number 1=WM5525-ND, componentlink1description=Datasheet, componentlink1url=https://www.molex.com/pdm_docs/sd/731000114_sd.pdf, componentlink2description="DigiKey Link", componentlink2url=https://www.digikey.com/en/products/detail/molex/0731000114/1465147, Connector Style=SMA, Connector Type="Receptacle, Female Socket", Contact Termination=Solder, Fastening Type=Threaded, lastupdated="29.06.2022 18:00:24", Lifecycle Status=Active, Minimum Order=1, Mounting Type="Through Hole, Right Angle", Number of Ports=1, packaging=Tray, Part Number=0731000114, Part Status=Active, price=3.19, series=73100, Shield Termination=Solder, Supplier 1=DigiKey, Impedance=50Ohm
J2: "CONN RCP USB3.1 TYPEC 24P SMD RA", Current Rating (Amps)="0.25A, 1A, 5A", manufacturer=Molex, Operating Temperature="-30°C ~ 85°C", Supplier Part Number 1=WM12856CT-ND, Voltage - Rated=30VAC/DC, componentlink1description=Datasheet, componentlink1url=https://www.molex.com/pdm_docs/ps/PS-105448-001.pdf, componentlink2description="DigiKey Link", componentlink2url=http://digikey.com/product-detail/en/molex/1054500101/WM12856CT-ND/5843891, Connector Type="USB - C (Type - C)", Gender=Receptacle, lastupdated="6.06.2020 02:14:04", Lifecycle Status=Active, Mating Cycles=10000, Minimum Order=1, Mounting Feature=Horizontal, Mounting Type="Surface Mount, Right Angle; Through Hole", Number of Contacts=24, Number of Ports=1, packaging=TapeAndReel, Part Number=1054500101, Part Status=Active, price=1.22, series=105445, Shielding=Shielded, Specifications="USB 3.1 (USB 3.1 Gen 2, Superspeed+)", Supplier 1=DigiKey, Termination=Solder
L1: library part MHQ1005075HA2N0STD25, "FIXED IND 2.0NH 1A 50 MOHM SMD", Current Rating (Amps)="1 A", DC Resistance (DCR)="50mOhm Max", Device Package="0402 (1005 Metric)", Frequency - Self Resonant=8GHz, manufacturer="TDK Corporation", Operating Temperature="-55°C ~ 125°C", Q @ Freq="20 @ 250MHz", Ratings=AEC-Q200, Supplier Device Package=0402, Supplier Part Number 1=445-MHQ1005075HA2N0STD25CT-ND, Tolerance=±0.3nH, Inductance Frequency - Test="100 MHz", componentlink1description=Datasheet, componentlink1url=https://product.tdk.com/system/files/dam/doc/product/inductor/inductor/smd/catalog/inductor_automotive_high-frequency_mhq1005075ha_en.pdf, componentlink2description="DigiKey Link", componentlink2url=https://www.digikey.com/en/products/detail/tdk-corporation/MHQ1005075HA2N0STD25/21727258, Height - Seated (Max)="0.030\" (0.75mm)", lastupdated="3.06.2024 20:12:06", Lifecycle Status=Active, Material - Core=Ceramic, Minimum Order=1, Mounting Type="Surface Mount", Package / Case="0402 (1005 Metric)", packaging=TapeAndReel, Part Number=MHQ1005075HA2N0STD25, partid=7450, price=0.07, series=MHQ, Shielding=Unshielded, Size / Dimension="0.039\" L x 0.020\" W (1.00mm x 0.50mm)", Supplier 1=DigiKey, Type=Multilayer, Inductance="2 nH"
L2: library part LQG15HH3N3C02D, "FIXED IND 3.3NH 800MA 0.125OHM", Current Rating (Amps)="800 mA", DC Resistance (DCR)="125mOhm Max", Device Package="0402 (1005 Metric)", Frequency - Self Resonant=6GHz, manufacturer="Murata Electronics", Operating Temperature="-55°C ~ 125°C", Q @ Freq="8 @ 100MHz", Ratings=AEC-Q200, Supplier Part Number 1=490-15041-1-ND, Tolerance=±0.2nH, Inductance Frequency - Test="100 MHz", componentlink1description=Datasheet, componentlink1url=https://search.murata.co.jp/Ceramy/image/img/P02/JELF243B-9101.pdf, componentlink2description="DigiKey Link", componentlink2url=https://www.digikey.com/en/products/detail/murata-electronics/LQG15HH3N3C02D/6798466, Height - Seated (Max)="0.022\" (0.55mm)", lastupdated="19.07.2024 23:59:52", Lifecycle Status=Active, Material - Core=Air, Minimum Order=1, Mounting Type="Surface Mount", Package / Case="0402 (1005 Metric)", packaging=TapeAndReel, Part Number=LQG15HH3N3C02D, Part Status=Active, partid=2999, price=0.05, series=LQG15, Shielding=Unshielded, Size / Dimension="0.039\" L x 0.020\" W (1.00mm x 0.50mm)", Supplier 1=DigiKey, Supplier Device Package="0402 (1005 Metric)", Type=Multilayer, Inductance="3.3 nH"
R2 R6: library part MCS0402MC1002FE000, "RES SMD 10K OHM 1% 1/10W 0402", Device Package="0402 (1005 Metric)", manufacturer="Vishay Beyschlag", Operating Temperature="-55°C ~ 175°C", Power (Watts)="0.1W, 1/10W", Ratings=AEC-Q200, Supplier Device Package=0402, Supplier Part Number 1=MCS0402-10.0K-MFCT-ND, Temperature Coefficient=±50ppm/°C, Tolerance=±1%, componentlink1description=Datasheet, componentlink1url=http://www.vishay.com/docs/28760/mcat_pro.pdf, componentlink2description="DigiKey Link", componentlink2url=http://digikey.com/product-detail/en/vishay-beyschlag/MCS0402MC1002FE000/MCS0402-10.0K-MFCT-ND/3883092, Composition="Thin Film", Features="Anti-Sulfur, Automotive AEC-Q200", Height - Seated (Max)="0.015\" (0.37mm)", lastupdated="9.02.2024 20:30:21", Lifecycle Status=Active, Minimum Order=1, Number of Terminations=2, Package / Case="0402 (1005 Metric)", packaging=TapeAndReel, Part Number=MCS0402MC1002FE000, Part Status=Active, partid=3152, price=0.03, Resistance="10 kOhms", series="MCS AT - Professional", Size / Dimension="0.039\" L x 0.020\" W (1.00mm x 0.50mm)", Supplier 1=DigiKey
R3: library part RMCF0402FT499R, "RES 499 OHM 1% 1/16W 0402", Device Package="0402 (1005 Metric)", manufacturer="Stackpole Electronics Inc", Operating Temperature="-55°C ~ 155°C", Power (Watts)="0.063W, 1/16W", Ratings=AEC-Q200, Supplier Device Package=0402, Supplier Part Number 1=RMCF0402FT499RCT-ND, Temperature Coefficient=±100ppm/°C, Tolerance=±1%, componentlink1description=Datasheet, componentlink1url=https://www.seielect.com/catalog/sei-rmcf_rmcp.pdf, componentlink2description="DigiKey Link", componentlink2url=https://www.digikey.com/en/products/detail/stackpole-electronics-inc/RMCF0402FT499R/1714756, Composition="Thick Film", Features="Automotive AEC-Q200", Height - Seated (Max)="0.016\" (0.40mm)", lastupdated="9.02.2024 20:30:13", Lifecycle Status=Active, Minimum Order=1, Number of Terminations=2, Package / Case="0402 (1005 Metric)", packaging=CutTape, Part Number=RMCF0402FT499R, Part Status=Active, partid=4940, price=0.01, Resistance="499 Ohms", series=RMCF, Size / Dimension="0.039\" L x 0.020\" W (1.00mm x 0.50mm)", Supplier 1=DigiKey
R4 R5: library part AC0402JR-075K1L, "RES SMD 5.1K OHM 5% 1/16W 0402", Device Package="0402 (1005 Metric)", manufacturer=Yageo, Operating Temperature="-55°C ~ 155°C", Power (Watts)="0.063W, 1/16W", Ratings=AEC-Q200, Supplier Device Package=0402, Supplier Part Number 1=YAG3554CT-ND, Temperature Coefficient=±100ppm/°C, Tolerance=±5%, componentlink1description=Datasheet, componentlink1url=https://www.yageo.com/upload/media/product/productsearch/datasheet/rchip/PYu-AC_51_RoHS_L_7.pdf, componentlink2description="DigiKey Link", componentlink2url=https://www.digikey.com/en/products/detail/yageo/AC0402JR-075K1L/5895695, Composition="Thick Film", Features="Automotive AEC-Q200, Moisture Resistant", Height - Seated (Max)="0.015\" (0.37mm)", lastupdated="31.08.2025 15:04:16", Lifecycle Status=Active, Minimum Order=1, Number of Terminations=2, Package / Case="0402 (1005 Metric)", packaging=CutTape, Part Number=AC0402JR-075K1L, Part Status=Active, partid=4690, price=0.01, Resistance="5.1 kOhms", series=AC, Size / Dimension="0.039\" L x 0.020\" W (1.00mm x 0.50mm)", Supplier 1=DigiKey
R7: library part CRCW04021K00JNEDHP, "RES SMD 1K OHM 5% 1/5W 0402", Device Package="0402 (1005 Metric)", manufacturer="Vishay Dale", Operating Temperature="-55°C ~ 155°C", Power (Watts)="0.2W, 1/5W", Ratings=AEC-Q200, Supplier Device Package=0402, Supplier Part Number 1=541-1.0KYACT-ND, Temperature Coefficient=±200ppm/°C, Tolerance=±5%, componentlink1description=Datasheet, componentlink1url=http://www.vishay.com/docs/20043/crcwhpe3.pdf, componentlink2description="DigiKey Link", componentlink2url=https://www.digikey.com/en/products/detail/vishay-dale/CRCW04021K00JNEDHP/2222560, Composition="Thick Film", Features="Automotive AEC-Q200, Pulse Withstanding", Height - Seated (Max)="0.016\" (0.40mm)", lastupdated="9.02.2024 20:30:06", Lifecycle Status=Active, Minimum Order=1, Number of Terminations=2, Package / Case="0402 (1005 Metric)", packaging=TapeAndReel, Part Number=CRCW04021K00JNEDHP, Part Status=Active, partid=6693, price=0.01, Resistance="1 kOhms", series=CRCW-HP, Size / Dimension="0.039\" L x 0.020\" W (1.00mm x 0.50mm)", Supplier 1=DigiKey
S1 S2: "SWITCH TACTILE SPST-NO 0.05A 24V", Contact Rating @ Voltage="0.05A @ 24VDC", manufacturer="Omron Electronics Inc-EMC Div", Operating Force=150gf, Operating Temperature="-25°C ~ 70°C", Supplier Part Number 1=SW1237CT-ND, Actuator Height off PCB, Vertical=4.30mm, Actuator Orientation="Top Actuated", Actuator Type=Standard, Circuit=SPST-NO, componentlink1description=Datasheet, componentlink1url=https://omronfs.omron.com/en_US/ecb/products/pdf/en-b3fs.pdf, componentlink2description="DigiKey Link", componentlink2url=http://digikey.com/product-detail/en/omron-electronics-inc-emc-div/B3FS-1012P/SW1237CT-ND/2747253, lastupdated="30.03.2020 15:12:46", Lifecycle Status=Active, Minimum Order=1, Mounting Type="Surface Mount", Outline="6.30mm x 6.00mm", packaging=TapeAndReel, Part Number=B3FS-1012P, Part Status=Active, price=0.35, series=B3FS, Supplier 1=DigiKey, Switch Function=Off-Mom, Termination Style="Gull Wing", Illumination=Non-Illuminated
U1: library part CMP-10700-118292493-1, "ESP32-S3R8 RF System on a Chip - SoC SMD IC, Dual-Core MCU, Wi-Fi 2.4G BLE 5.0 Combo", NexarPartId=118292493
U2: "17V Clamp 5A (8/20Âµs) Ipp Tvs Diode Surface Mount SOT-23-6", Package="SOT-23-6 STMicroelectronics", Availability="In Stock", Check_prices=https://www.snapeda.com/parts/USBLC6-2SC6/STMicroelectronics/view-part/?ref=eda, MF=STMicroelectronics, MP=USBLC6-2SC6, price=None, Purchase-URL=https://pricing.snapeda.com/search/part/USBLC6-2SC6/?ref=eda, SnapEDA_Link=https://www.snapeda.com/parts/USBLC6-2SC6/STMicroelectronics/view-part/?ref=snap
U3: "SSD1306 128x64 0.96 inch OLED Display"
U4: "Sot223/Pkg 1-Amp 3.3-Volt Low Drop Out Voltage Regulatator", Package="SOT-223 Seeed Technology", Check_prices=https://www.snapeda.com/parts/AMS1117-3.3/Advanced+Monolithic+Systems/view-part/?ref=eda, MF="Advanced Monolithic Systems", MP=AMS1117-3.3, SnapEDA_Link=https://www.snapeda.com/parts/AMS1117-3.3/Advanced+Monolithic+Systems/view-part/?ref=snap
Y1: library part NX3225SA-40M-EXS00A-CS03880, "CRYSTAL 40.0000MHZ 10PF SMD", ESR (Equivalent Series Resistance)="50 Ohms", Frequency Stability=±17ppm, Frequency Tolerance=±10ppm, Load Capacitance=10pF, manufacturer="NDK America, Inc.", Operating Mode=Fundamental, Operating Temperature="-40°C ~ 85°C", Package / Case="4-SMD, No Lead", Supplier Part Number 1=644-1249-1-ND, componentlink1description=Datasheet, componentlink1url=//media.digikey.com/pdf/Data%20Sheets/NDK%20PDFs/NX3225SA-40M-EXS00A-CS03880.pdf, componentlink2description="DigiKey Link", componentlink2url=https://www.digikey.com/en/products/detail/ndk-america-inc/NX3225SA-40M-EXS00A-CS03880/5015625, Frequency="40 MHz", Height - Seated (Max)="0.024\" (0.60mm)", lastupdated="3.06.2024 20:02:21", Lifecycle Status=Active, Minimum Order=1, Mounting Type="Surface Mount", packaging=TapeAndReel, Part Number=NX3225SA-40M-EXS00A-CS03880, Part Status=Active, partid=586, price=0.36, series=NX3225SA, Size / Dimension="0.126\" L x 0.098\" W (3.20mm x 2.50mm)", Supplier 1=DigiKey, Type="MHz Crystal"

## Via types
v1: diameter 0.45, hole 0.2, Top Layer to Bottom Layer, 144 vias
v2: diameter 0.75, hole 0.35, Top Layer to Bottom Layer, 48 vias
v3: diameter 0.5, hole 0.25, Top Layer to Bottom Layer, 3 vias

## Nets (pads, with @x,y where several pads share a name; then routed paths per layer and width w, separated by ;. In a path a pad name is that pad's centre, name@x,y a point inside that pad or via, vN(x,y) a via of type N, cw(c..) or ccw(c..) an arc to the next point about the centre after c; other vN are vias at no path point)
3V3: C2.2 C3.2 C4.2 C8.2 C9.2 C14.2 C15.2 C21.2 C22.2 J4.1 J4.2 L1.1 R2.2 R6.2 R7.2 U1.20 U1.46 U1.55 U1.56 U3.1 U4.2 | length 229.3
  Top Layer w0.2: 25.875,19.975 25.884,19.975 U1.20 ; U1.46 30.65,12.38 30.65,12.025 ; U1.55 33.296,14.825 33.712,14.825 33.787,14.9 U1.56
  Top Layer w0.3: R6.2 9.09,9.535 10.585,9.535 v2(10.6,9.55) ; R2.2 9.088,23.487 10.563,23.487 v2(10.575,23.475) ; C22.2 C21.2 ; R7.2 17.213,5.963 18.638,5.963 v2(18.65,5.975) ; v2(19.15,17.575) 18.375,18.35 C21.2 ; U4.2 18.8,24.2 18.375,23.775 C21.2 ; v2(25.3,26.425) 25.3,22.875 25.7,22.475 25.7,21.3 25.186,20.786 C9.2 25.875,19.975 ; 30.65,12.025 31.1,11.575 31.1,10.459 C8.2@31.503,10.056 ; v2(31.025,27.7) 31.075,27.7 32.473,26.302 v2(32.523,26.302) ; C8.2 31.45,10.036 30.614,9.2 v2(30.575,9.2) 32.85,6.925 34.899,6.925 38.025,10.051 v2(38.025,10.15) ; C3.2 32.587,22.097 C3.2@32.602,22.083 ; 33.787,14.9 34.599,15.712 35.537,15.712 36.375,16.55 36.717,16.55 37.181,16.086 C14.2 37.314,16.106 38.149,16.941 C15.2 38.18,16.961 39.019,17.8 v2(39.05,17.8) ; L1.1@35.425,21.397 L1.1 35.342,21.362 33.855,21.362 33.701,21.208 33.489,21.208 C4.2 33.462,21.222 C3.2@32.602,22.083 ; v2(37.15,22.723) 36.073,23.8 34.53,23.8 C2.2 32.814,22.083 C3.2@32.602,22.083 ; v2@37.15,22.725 37.152,22.725 39.727,25.3 68.4,25.3 71.05,27.95 J4.1 J4.2 68.51,30.376 68.334,30.2 50.925,30.2 50.73,30.005 U3.1
  Bottom Layer w0.3: v2(19.15,17.575) 17.775,18.95 12.8,18.95 12.79,18.94 10.878,18.94 10.575,19.243 ; v2(25.3,23.625) 29.875,28.2 30.403,28.2 30.903,27.7 v2(31.025,27.7) ; v2(25.3,26.425) 25.3,27.749 25.124,27.925 12.1,27.925 10.575,26.4 v2(10.575,23.475) 10.575,19.243 ; v2(30.575,9.2) 27.35,5.975 v2(18.65,5.975) 10.776,5.975 10.6,6.151 v2(10.6,9.55) 10.6,10.75 9.9,11.45 9.9,16.125 10.575,16.8 10.575,19.243 ; v2(32.523,26.302) 32.627,26.302 36.4,30.075 50.554,30.075 50.73,29.899 U3.1 ; v2(38.025,10.15) 38.1,10.15 41.175,13.225 41.175,15.675 v2(39.05,17.8)
+5: C17.2 C18.2 C19.2 C20.2 FB1.2 J3.1 J3.2 U4.3 | length 90.4
  Top Layer w0.3: C19.2 C20.2 18.575,26.775 18.86,26.49 U4.3 21.06,26.49 22,25.55 22,19 18.588,15.587 v2(18.588,14.163) 18.425,14 C18.2 17.3,14.5 17.3,15.12 17.5,15.32 C17.2 FB1.2 ; v2(23.875,4.775) v2(23.875,9.875) ; v2(34.325,5.225) 41.625,5.225 42.425,4.425 v2(47.95,4.425) ; v2(51.2,4.475) 66.7,4.475 68.463,2.712 68.463,1.547 J3.2
  Bottom Layer w0.3: v2(18.588,14.163) 18.588,13.137 19.45,12.275 21.475,12.275 v2(23.875,9.875) ; v2(23.875,4.775) 33.753,4.775 34.203,5.225 v2(34.325,5.225) ; v2(47.95,4.425) 47.975,4.45 51.175,4.45 v2(51.2,4.475) ; J3.2 J3.1
CHIP_PU: C23.2 J3.5 R6.1 S2.3 S2.4 U1.4 | length 76.9
  Top Layer w0.2: v1(31.6,16.95) 31.6,17.63 U1.4
  Top Layer w0.3: S2.4 4.37,7.27 4.94,7.84 C23.2 R6.1 7.925,7.875 8.53,7.27 S2.3 10.505,7.275 v1(11.925,7.275)
  Bottom Layer w0.2: v1(11.925,7.275) 22.375,7.275 26.814,11.714 26.814,12.164 v1(31.6,16.95) 31.65,16.95 33.95,14.65 33.95,13.35 40.1,7.2 58.825,7.2 60.89,5.135 J3.5
GND: B1.4 B1.9 C1.2 C2.1 C3.1 C4.1 C5.1 C6.1 C7.1 C8.1 C9.1 C10.1 C11.1 C12.1 C13.1 C14.1 C15.1 C16.1 C17.1 C18.1 C19.1 C20.1 C21.1 C22.1 C23.1 D1.2 J1.G J2.A1 J2.A12 J2.B1 J2.B12 J2.S J3.3 J3.4 J6.5 J6.6 R4.1 R5.1 S1.1 S1.2 S2.1 S2.2 U1.57 U2.2 U3.0 U4.1 Y1.2 Y1.4 | length 59.5
  Top Layer w0.2: Y1.4 33.481,12.481 32.875,11.875 32.875,11.447 C7.1 32.514,11.064 32.125,10.675 32.125,10.45 33.15,9.425 33.225,9.5 33.825,9.5 v2(33.9,9.575) ; Y1.2 36.825,13.619 36.825,14.039 37.111,14.325 C1.2@37.111,14.426
  Top Layer w0.3: v2(1,2.77) S2.2 ; v2(1,30.25) S1.1 ; v2(2.8,9.52) C23.1 ; v2(2.8,23.5) C6.1 ; J2.S@7.245,12.19 6.961,12.19 6.592,12.56 6.592,12.843 6.545,12.89 6.545,13.21 6.345,13.41 6.445,13.51 7.655,13.51 ; J2.S@7.245,20.83 6.961,20.83 6.555,20.424 6.555,19.81 6.355,19.61 6.455,19.51 7.655,19.51 ; v2(9.5,20.3) 9.524,20.276 10.324,20.276 10.5,20.1 R5.1 ; U2.2 9.769,16.486 10.614,16.486 10.954,16.146 10.954,15.721 v2(11.025,15.65) ; S2.1 v2(12.1,2.77) ; R4.1 v2(11.6,14) ; S1.2 v2(12.1,30.25) ; v2@11.906,19.55 C22.1 ; v2(13.5,8.2) 13.975,8.675 B1.4 ; C19.1 v2(13.525,30.25) ; v2(13.6,14) C18.1 15.01,14.19 15.01,14.974 14.5,15.485 C16.1 ; D1.2 v2(18.65,4.2) ; C17.1 v2(17.5,18.042) ; U4.1 v2(21.3,21.91) ; C21.1 v2(21.3,19.55) ; C20.1 20.25,28.925 J6.5 ; v2(20.6,15.6) 20.6,15.538 21.214,14.924 C12.1 ; v2(21.4,16.4) C13.1 ; v2(24.3,22.7) 24,22.4 24,21.85 C9.1 ; v2(31.25,22.15) 31.264,22.15 31.939,21.475 C3.1 31.965,21.475 32.84,20.6 C4.1 ; C8.1 32.111,9.401 33.025,8.487 v2(33.025,8.475) ; v2(34.3,18.9) 34.3,18.925 35.1,19.725 C5.1 ; C2.1 34.414,22.4 34.939,22.925 35.4,22.925 v2(36.425,21.9) ; v2(35.175,16.675) 35.175,16.68 35.89,17.395 C11.1 ; C10.1 36.928,19.8 37.6,20.472 v2(37.6,20.5) ; C1.2 37.111,14.426 37.8,13.738 v2(37.8,13.7) ; C14.1 v2(38.7,14.7) ; C15.1 38.771,16.334 39.7,15.405 v2(39.7,15.4)
  other v1: 28.5,14.5 70.528,14.683 71.478,14.685 28,15 29,15 69.697,15.144 72.307,15.148 27.5,15.5 28.5,15.5 29.5,15.5 52.735,15.636 53.685,15.636 54.635,15.636 55.585,15.636 56.535,15.636 57.485,15.636 58.435,15.636 59.385,15.636 60.335,15.636 61.285,15.636 62.235,15.636 63.185,15.636 64.135,15.636 65.085,15.636 66.035,15.636 66.985,15.636 67.935,15.636 68.885,15.636 51.785,15.667 50.866,15.908 72.805,15.957 28.969,15.983 27,16 28,16 30,16 50.046,16.387 27.5,16.5 28.5,16.5 29.5,16.5 30.5,16.5 72.847,16.906 27,17 28,17 29,17 30,17 49.353,17.037 52.928,17.384 53.878,17.384 54.828,17.384 55.778,17.384 56.728,17.384 57.678,17.384 58.628,17.384 59.578,17.384 60.528,17.384 61.478,17.384 62.428,17.384 63.378,17.384 64.328,17.384 65.278,17.384 66.228,17.384 67.178,17.384 68.128,17.384 69.078,17.384 51.979,17.397 27.5,17.5 28.5,17.5 29.5,17.5 48.681,17.708 72.419,17.754 51.105,17.77 69.82,17.978 28,18 29,18 71.632,18.287 70.686,18.368 48.009,18.38 50.426,18.435 28.5,18.5 47.337,19.052 49.754,19.106 46.666,19.724 49.083,19.778 39.499,19.854 45.939,20.336 40.265,20.416 48.411,20.45 41.208,20.526 42.158,20.526 43.108,20.526 44.058,20.526 45.008,20.526 47.739,21.122 38.366,21.192 47.006,21.726 39.114,21.778 46.144,22.125 39.989,22.148 40.93,22.274 41.88,22.274 42.83,22.274 43.78,22.274 45.205,22.268
  other v2: 11.91,19.592
  other v3: 16.6,10 15.8,11 17.5,11
GPIO0: C6.2 R2.1 S1.3 S1.4 U1.5 | length 38.2
  Top Layer w0.2: S1.4 10.525,25.725 v1(11.975,25.725) ; v1(31.029,17.625) U1.5
  Top Layer w0.3: S1.3 4.375,25.75 4.94,25.185 C6.2 R2.1 7.925,25.525 8.15,25.75 S1.4
  Bottom Layer w0.2: v1(11.975,25.725) 18.75,25.725 26.6,17.875 26.975,17.875 28.275,19.175 28.675,19.175 30.544,17.306 30.71,17.306 v1(31.029,17.625)
GPIO1: J4.3 U1.6 | length 42.3
  Top Layer w0.2: U1.6 31.388,18.544 32.046,19.202 v1(32.092,19.202)
  Bottom Layer w0.2: v1(32.092,19.202) 32.092,19.248 36.169,23.325 61.8,23.325 65.97,27.495 J4.3
GPIO2: J4.4 U1.7 | length 42.4
  Top Layer w0.2: v1(30.475,18.225) 30.493,18.225 31.095,18.827 U1.7
  Bottom Layer w0.2: v1(30.475,18.225) 36.025,23.775 60.85,23.775 63.43,26.355 J4.4
GPIO3: J4.5 U1.8 | length 38.3
  Top Layer w0.2: U1.8 31.442,19.735 31.442,19.831 v1(31.49,19.879)
  Bottom Layer w0.2: v1(31.49,19.879) 35.836,24.225 58.7,24.225 60.89,26.415 J4.5
GPIO4: J4.6 U1.9 | length 37.4
  Top Layer w0.2: v1(29.919,18.825) 29.961,18.825 30.529,19.393 U1.9
  Bottom Layer w0.2: v1(29.919,18.825) 30.95,19.856 30.95,20.1 35.55,24.7 56.25,24.7 58.35,26.8 J4.6
GPIO5: J4.7 U1.10 | length 35.6
  Top Layer w0.2: U1.10 30.252,19.681 30.702,20.132 30.702,20.552 v1(30.75,20.6)
  Bottom Layer w0.2: v1(30.75,20.6) 35.3,25.15 55.6,25.15 57.4,26.95 57.4,29.93 J4.7
GPIO6: J4.8 U1.11 | length 36.6
  Top Layer w0.2: v1(29.325,19.375) 29.38,19.375 29.963,19.959 U1.11
  Bottom Layer w0.2: v1(29.325,19.375) 29.325,21.2 33.75,25.625 54.683,25.625 54.8,25.742 54.8,30.25 53.53,31.52 J4.8
GPIO7: J4.9 U1.12 | length 31
  Top Layer w0.2: U1.12 30.375,20.931 30.375,22.275 34.1,26 51.025,26 52,26.975 v1(52,29.225)
  Bottom Layer w0.2: J4.9 52,30.25 v1(52,29.225)
GPIO8: U1.13 U3.3 | length 31.2
  Top Layer w0.2: U1.13 30,21.121 30,22.425 33.95,26.375 50.45,26.375 v1(50.825,26.75) ; v1(52.55,26.75) 54.95,26.75 55.81,27.61 U3.3
  Bottom Layer w0.2: v1(50.825,26.75) v1(52.55,26.75)
GPIO9: U1.14 U3.2 | length 28
  Top Layer w0.2: U1.14 29.12,20.813 29.371,21.064 29.371,21.979 v1(29.35,22)
  Bottom Layer w0.2: v1(29.35,22) 33.65,26.3 49.15,26.3 50.225,27.375 51.948,27.375 U3.2
GPIO10: J4.12 U1.15 | length 22.4
  Top Layer w0.2: U1.15 27.629,21.058 27.629,21.579 31.35,25.3 32.373,25.3 33.7,26.627 33.7,27 34.1,27.4 41.85,27.4 43.11,28.66 J4.12
GPIO11: J4.13 U1.16 | length 20.4
  Top Layer w0.2: U1.16 27.597,20.53 27.175,20.952 27.175,22.1 v1(31.075,26) ; v1(32.475,27.45) 32.525,27.45 33.075,28 39.25,28 40.57,29.32 J4.13
  Bottom Layer w0.2: v1(31.075,26) 32.475,27.4 v1(32.475,27.45)
GPIO12: J4.14 U1.17 | length 19.9
  Top Layer w0.2: U1.17 26.625,20.931 26.625,24.4 30.875,28.65 37.125,28.65 38.03,29.555 J4.14
GPIO13: J4.15 U1.18 | length 18.4
  Top Layer w0.2: U1.18 26.225,20.765 26.225,24.975 30.325,29.075 34.9,29.075 35.49,29.665 J4.15
GPIO14: J4.16 U1.19 | length 16.5
  Top Layer w0.2: U1.19@27.005,19.425 27.355,19.075 v1(27.375,19.075)
  Bottom Layer w0.2: v1(27.375,19.075) 25.875,20.575 25.875,21.587 32.85,28.562 32.85,31.42 J4.16
GPIO15: J6.1 U1.21 | length 18.3
  Top Layer w0.2: U1.21 v1(26.793,18.5)
  Bottom Layer w0.2: v1(26.793,18.5) 23.3,21.993 23.3,23.1 30.41,30.21 J6.1
GPIO16: J6.2 U1.22 | length 15.5
  Top Layer w0.2: U1.22 23.45,21.277 23.45,25.65 27.87,30.07 J6.2
GPIO17: J6.3 U1.23 | length 14.9
  Top Layer w0.2: J6.3 25.33,28.38 23.092,26.142 23.092,21.07 U1.23
GPIO18: J6.4 U1.24 | length 14.5
  Top Layer w0.2: J6.4 22.79,26.79 22.55,26.55 22.55,21.04 25.329,18.262 U1.24
GPIO21: J5.6 U1.27 | length 30.7
  Top Layer w0.2: J5.6 17.638,1.572 17.638,2.562 17.3,2.9 13.575,2.9 12.6,3.875 12.6,11.55 13.15,12.1 18.5,12.1 19.8,13.4 19.8,16 21.802,18.002 23.897,18.002 U1.27
GPIO33: J5.3 U1.38 | length 12.4
  Top Layer w0.2: J5.3 25.33,11.926 U1.38
GPIO34: J5.2 U1.39 | length 12.9
  Top Layer w0.2: U1.39 25.8,11.83 25.8,5.175 27.87,3.105 J5.2
GPIO35: J5.1 U1.40 | length 14
  Top Layer w0.2: U1.40 26.35,11.814 26.35,5.525 28.525,3.35 29.6,3.35 30.388,2.562 30.388,1.522 J5.1
GPIO36: J3.16 U1.41 | length 15.7
  Top Layer w0.2: U1.41 26.8,11.699 26.8,5.75 28.75,3.8 31.8,3.8 32.95,2.65 J3.16
GPIO37: J3.15 U1.42 | length 17.2
  Top Layer w0.2: U1.42 27.3,11.633 27.3,5.975 29.125,4.15 33.925,4.15 35.49,2.585 J3.15